# Altium PCB PCB_layout.PcbDoc
Units mil, origin at the board's own origin, x right, y up, seen from the top; angles counter-clockwise.
Board outline 2530 x 2800 mil, 2 copper layers (Top Layer, Bottom Layer); 33 components, 35 nets, 108 pads, 6 vias.
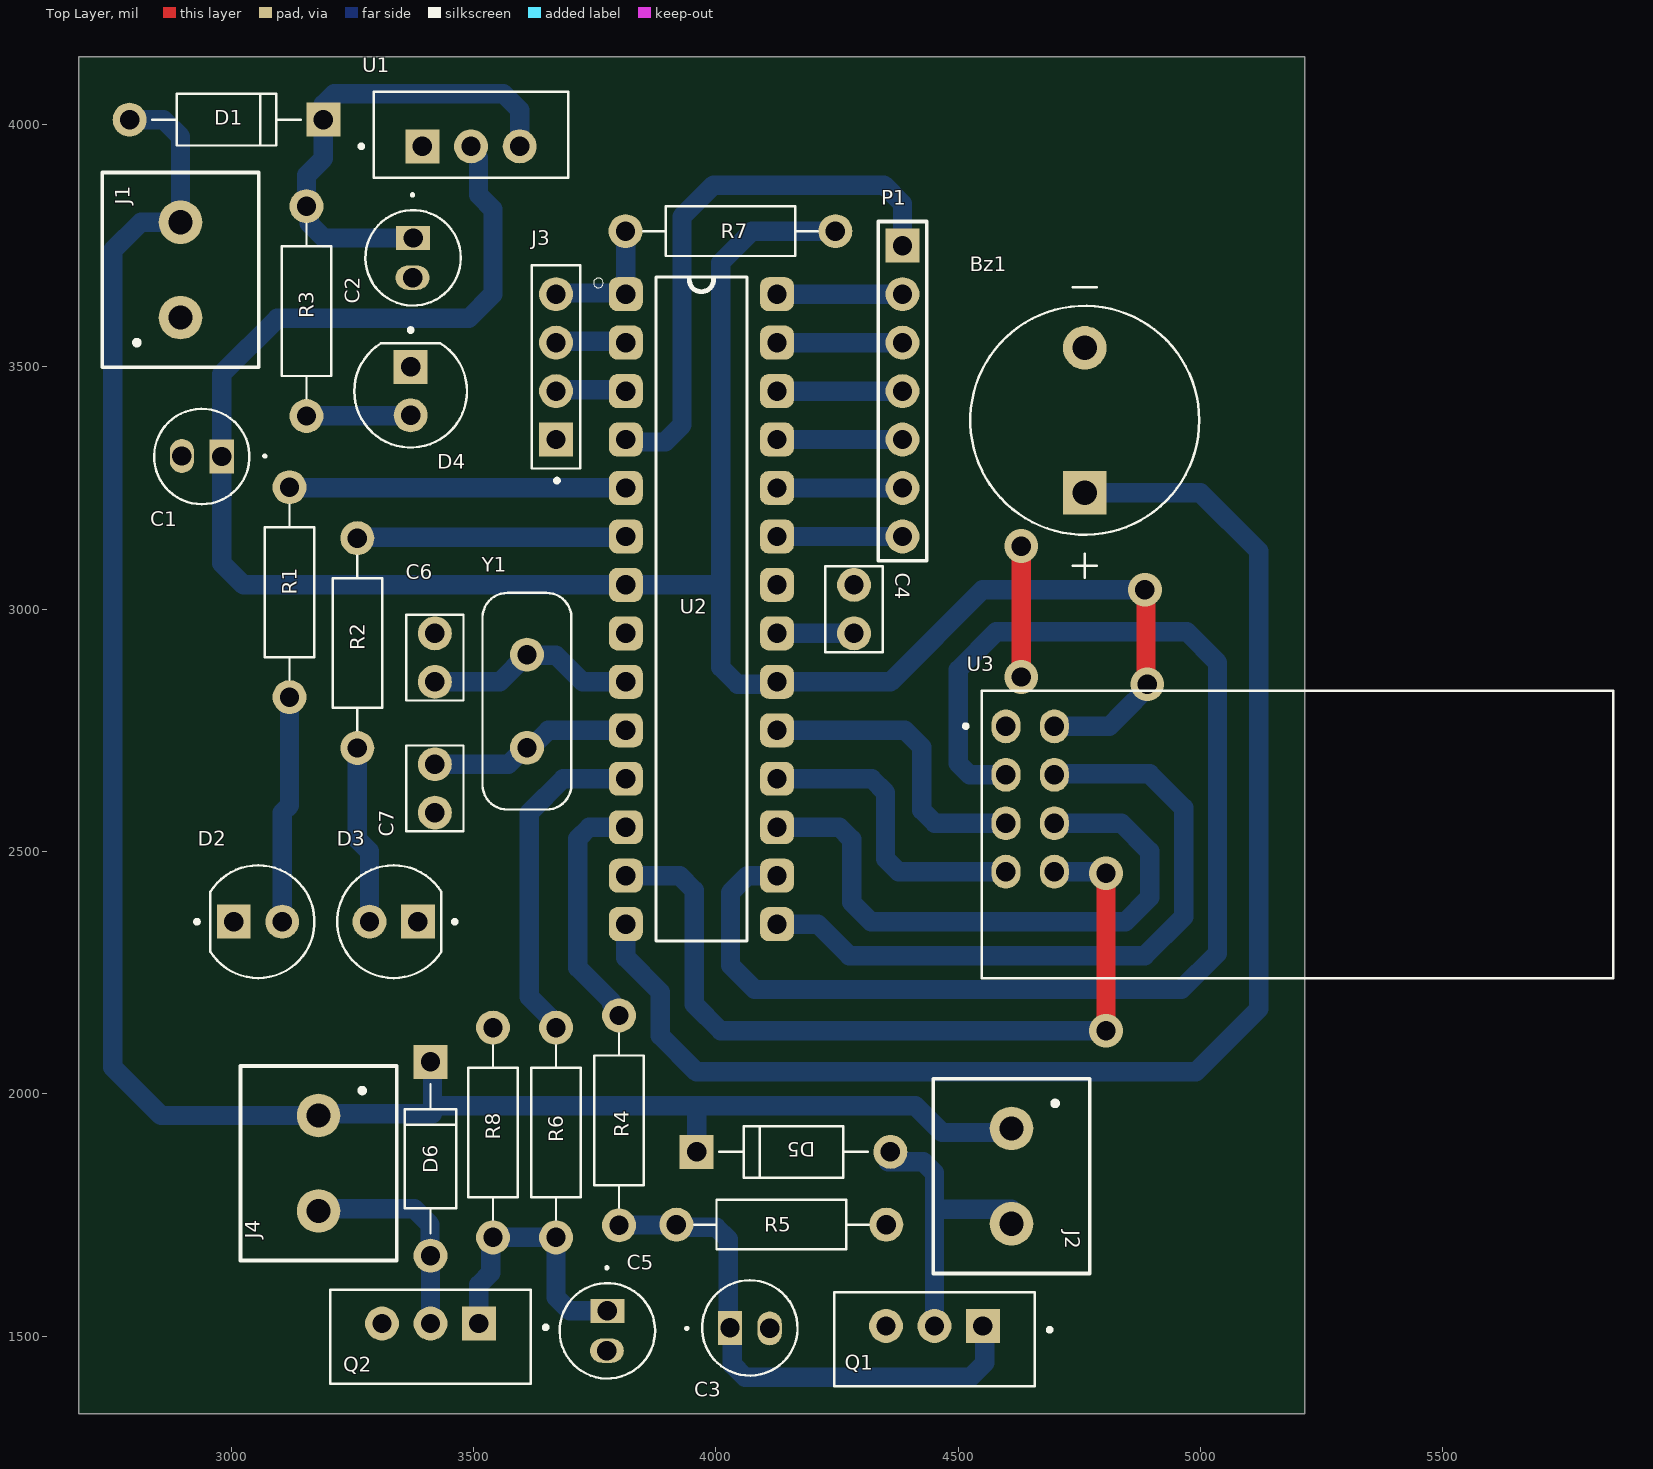
[diagram p0: Top Layer view]
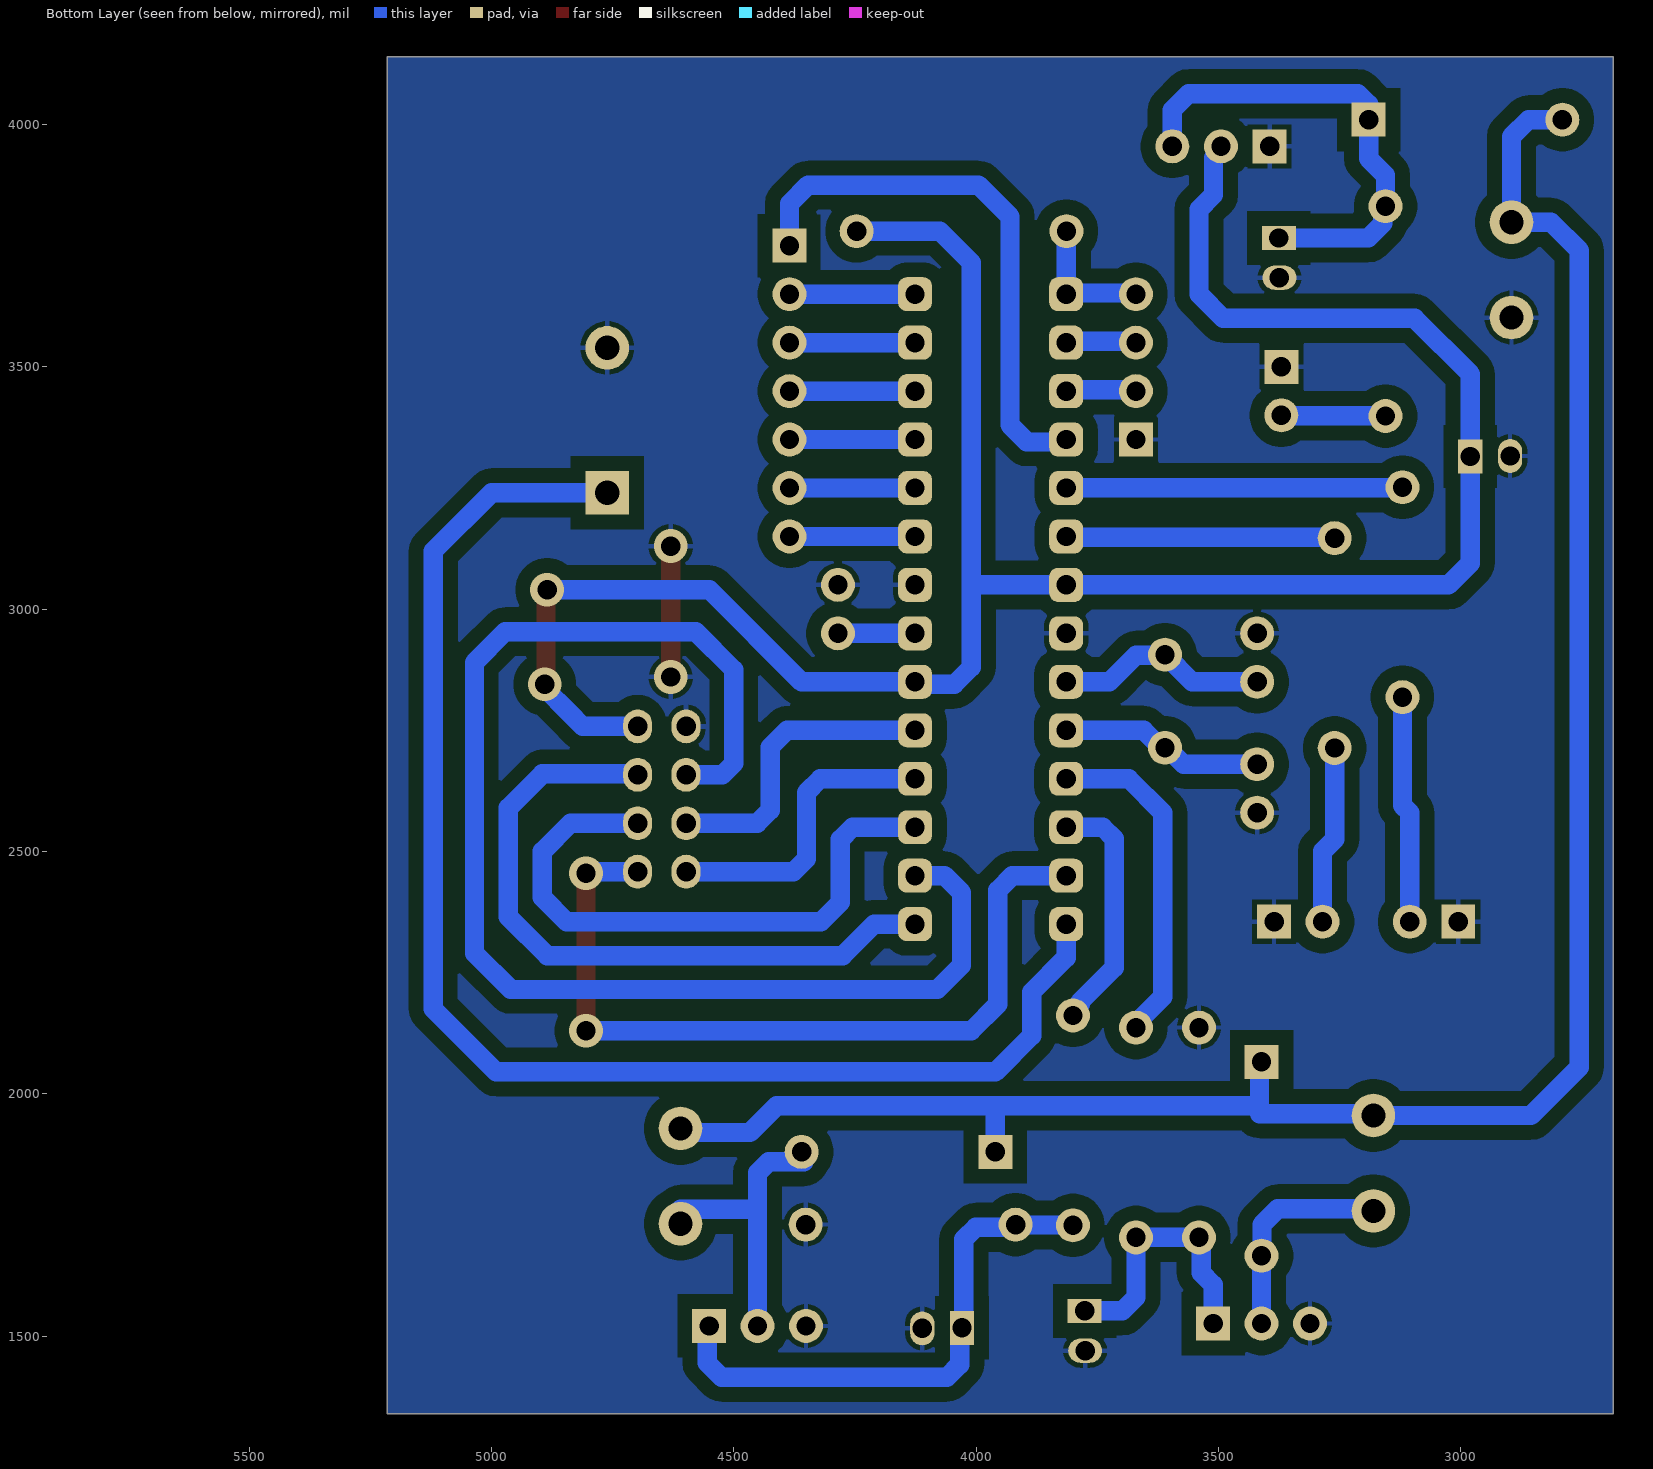
[diagram p1: Bottom Layer view, seen from below]
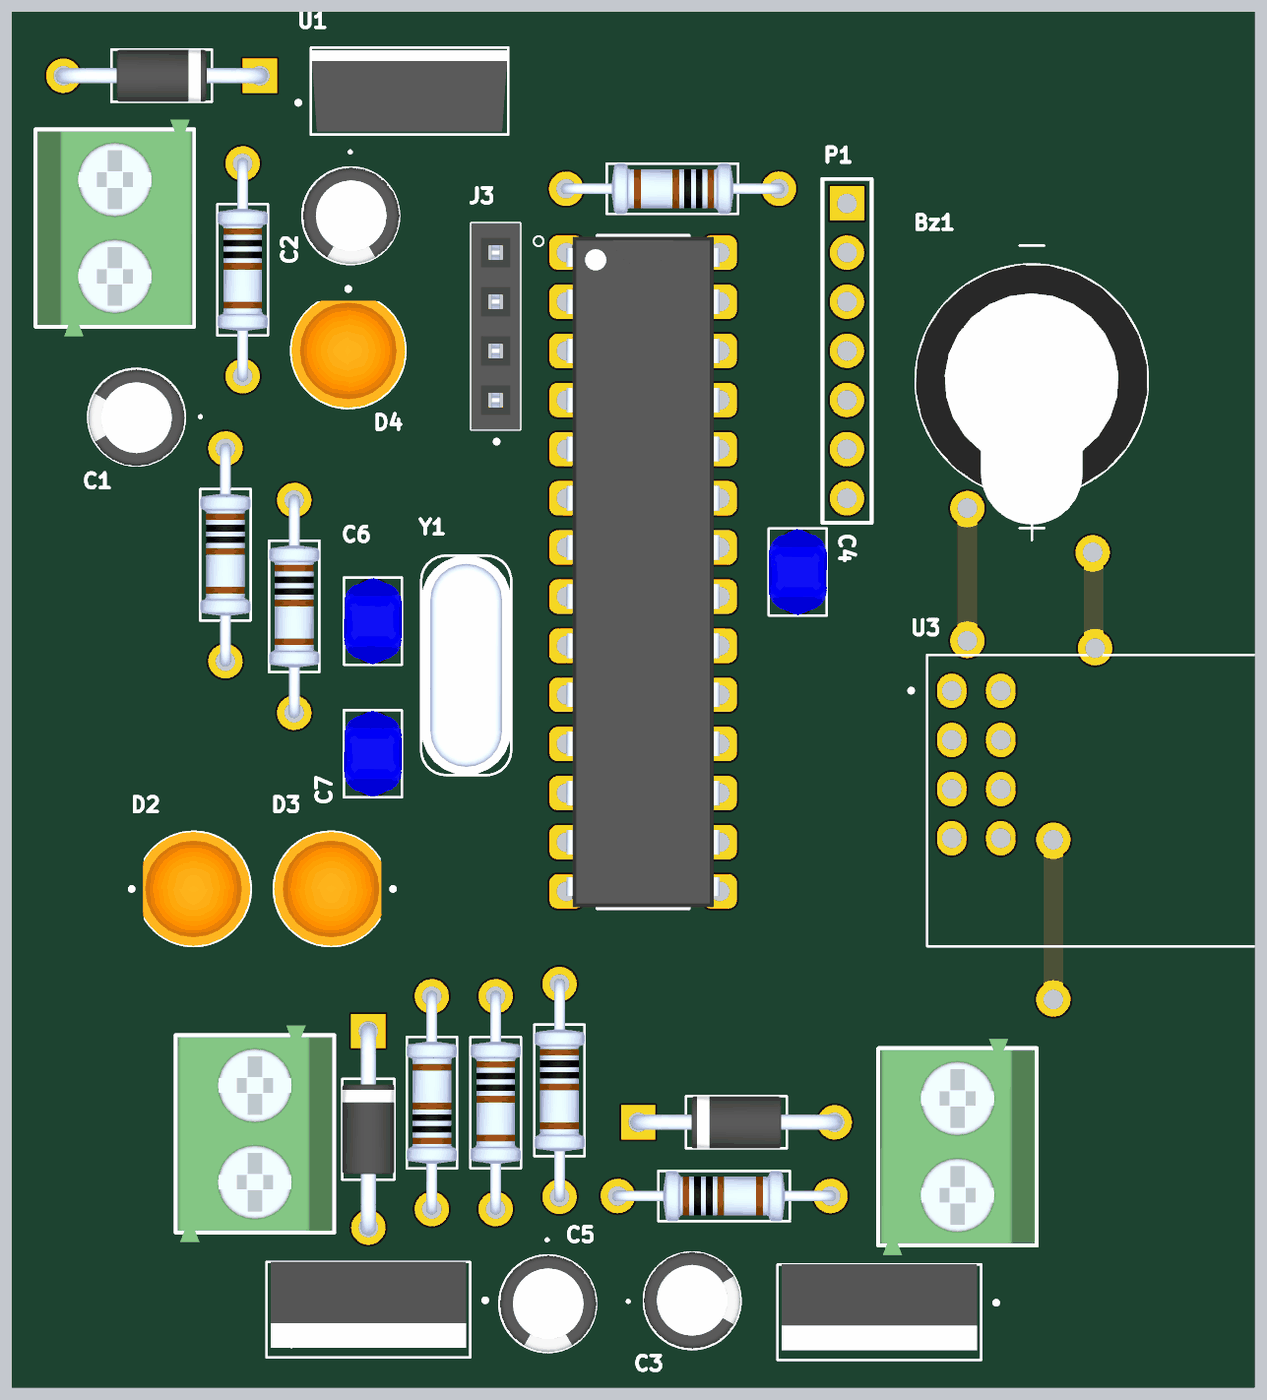
[diagram p2: 3D render of the assembled board from above, using the file's embedded part models]

## Layer stack, top to bottom
Top Solder: solder mask 0.4, Solder Resist, Dk 3.5
Top Layer: signal copper 1.4
Dielectric 1: dielectric 12.6, FR-4, Dk 4.8
Bottom Layer: signal copper 1.4
Bottom Solder: solder mask 0.4, Solder Resist, Dk 3.5

## Board outline
2685,1340 5215,1340 5215,4140 2685,4140

## Design rules (kind name [scope] priority, off if disabled: settings)
Clearance [All] p1: gap=30 ignorepadtopadclearanceinfootprint=FALSE
PolygonConnect [All] p1: connectstyle=Relief reliefconductorwidth=10 reliefentries=4 polygonreliefangle="90 Angle" airgapwidth=10
RoutingVias [All] p1: holewidth=40 width=70 viastyle="Through Hole" minholewidth=40 minwidth=70 maxholewidth=40 maxwidth=70
SolderMaskExpansion [All] p1: expansion=4 istentingtop=FALSE
Width [All] p1: maxlimit=50 minlimit=30 preferedwidth=40
30 further rules are at their usual default settings.

## Components (designator, comment, footprint, x,y, rotation, side; value= is the part's Value field where it differs from the comment)
Bz1 "AI-1223-TWT-12V-R" XDCR_AI-1223-TWT-12V-R 4761.09,3389.61 r180 top
C1 "10uF" CAPPRD500W50D500H1100 2939,3315 r180 top
C2 "100uF" CAPPRD500W50D500H1100 3375,3725 r270 top
C3 "100uF" CAPPRD500W50D500H1100 4069.91,1516.78 r0 top
C4 "100nF" CAPRB500W50L450T300H550 4285,2950 r90 top
C5 "100uF" CAPPRD500W50D500H1100 3775.91,1510.78 r270 top
C6 "22pF" CAPRB500W50L450T300H550 3420,2850 r90 top
C7 "22pF" CAPRB500W50L450T300H550 3420,2680 r270 top
D1 "1N4007" DIOAD1060W80L520D270 2990,4010 r180 top
D2 "L08R5000Q1" LEDRD254W57D500H1070 3055,2355 r0 top
D3 "L08R5000Q1" LEDRD254W57D500H1070 3335,2355 r180 top
D4 "L08R5000Q1" LEDRD254W57D500H1070 3370,3450 r270 top
D5 "1N4007" DIOAD1060W80L520D270 4160,1880 r0 top
D6 "1N4007" DIOAD1060W80L520D270 3410.91,1865.78 r270 top
J1 "TBlock 2" 691111710002 2895,3700 r90 top
J2 "TBlock 2" 691111710002 4610,1830 r270 top
J3 "Header 4" SULLINS_PPTC041LFBN-RC 3670,3500 r90 top
J4 "TBlock 2" 691111710002 3180,1856.57 r270 top
P1 "Header 7" HDR1X7 4385,3750 r270 top
Q1 "N-Channel mosfet" TO254P1052X465X1989-3 4550.91,1520.78 r180 top
Q2 "N-Channel mosfet" TO254P1052X465X1989-3 3510.91,1525.78 r180 top
R1 "100" RESAD1100W55L680D260 3120,3035 r90 top
R2 "100" RESAD1100W55L680D260 3260,2930 r90 top
R3 "1k" RESAD1100W55L680D260 3155,3615 r90 top
R4 "1k" RESAD1100W55L680D260 3800,1945 r90 top
R5 "1k" RESAD1100W55L680D260 4135,1730 r180 top
R6 "1k" RESAD1100W55L680D260 3670,1920 r90 top
R7 "10k" RESAD1100W55L680D260 4030,3780 r0 top
R8 "1k" RESAD1100W55L680D260 3540,1920 r270 top
U1 "LD1117V33" TO255P1020X450X1968-3 3494.61,3978.82 r0 top
U2 "ATMEGA328P-PU" DIP794W46P254L2967H457Q28B 3970,3000 r0 top
U3 "NRF24L01" XCVR_NRF24L01P-MODULE-PCB 5200,2535 r0 top
Y1 "16MHz" XTAL_ECS-160-20-4X 3610,2810 r270 top

## Footprints (in the part's own frame and the unit in brackets; to place one, negate y for a bottom-side part, rotate by r counter-clockwise, add the part's x,y. Pads: shape width x height; smd on the part's side, far side on the other; paste and mask are expansions set on the pad)
691111710002 [mil]
  round 90 hole 50: 1(-98.43,0) 2(98.43,0)
  silkscreen extent -201,-161 201,161, body extent -220,-157 220,157, height 434
CAPPRD500W50D500H1100 [mil]
  oval 50x70 hole 40: N(41,-1)
  rect 50x70 hole 40: P(-41,0)
  silkscreen extent -131,-98 98,98, body extent -108,-97 108,99, height 434
CAPRB500W50L450T300H550 [mil]
  round 70 hole 40: 1(0,0) 2(100,0)
  silkscreen extent -39,-59 139,59, body extent -38,-59 138,59, height 210
DIOAD1060W80L520D270 [mil]
  round 70 hole 40: A(200,0)
  rect 70x70 hole 40: C(-200,0)
  silkscreen extent -154,-53 154,53, body extent -216,-53 216,53, height 99
DIP794W46P254L2967H457Q28B [mil]
  rrect50% 70x70 hole 40: 1(-155.91,650) 2(-155.91,550) 3(-155.91,450) 4(-155.91,350) 5(-155.91,250) 6(-155.91,150) 7(-155.91,50) 8(-155.91,-50) 9(-155.91,-150) 10(-155.91,-250) 11(-155.91,-350) 12(-155.91,-450) 13(-155.91,-550) 14(-155.91,-650) 15(155.91,-650) 16(155.91,-550) 17(155.91,-450) 18(155.91,-350) 19(155.91,-250) 20(155.91,-150) 21(155.91,-50) 22(155.91,50) 23(155.91,150) 24(155.91,250) 25(155.91,350) 26(155.91,450) 27(155.91,550) 28(155.91,650)
  silkscreen extent -223,-685 94,685, body extent -156,-682 156,683, height 180
HDR1X7 [mil] "Connector; Header; 7 Position"
  rect 70x70 hole 40: 1(0,0)
  round 70 hole 40: 2(100,0) 3(200,0) 4(300,0) 5(400,0) 6(500,0) 7(600,0)
  silkscreen extent -50,-50 650,50
LEDRD254W57D500H1070 [mil]
  round 70 hole 40: A(50,0)
  rect 70x70 hole 40: C(-50,0)
  silkscreen extent -130,-116 116,116, body extent -102,-116 116,116, height 358
RESAD1100W55L680D260 [mil]
  round 70 hole 40: 1(-216.54,0) 2(216.54,0)
  silkscreen extent -180,-51 180,51, body extent -227,-51 227,51, height 101
SULLINS_PPTC041LFBN-RC [mil]
  rect 70x70 hole 40: 1(-150,0)
  round 70 hole 40: 2(-50,0) 3(50,0) 4(150,0)
  silkscreen extent -239,-50 210,50, body extent -210,-50 210,50, height 335
TO254P1052X465X1989-3 [mil]
  rect 70x70 hole 40: 1(0,0)
  round 70 hole 40: 2(100,0) 3(200,0)
  silkscreen extent -142,-70 307,124, body extent -99,-71 299,105, height 781
TO255P1020X450X1968-3 [mil]
  rect 70x70 hole 40: 1(-100.39,-23.82)
  round 70 hole 40: 2(0,-23.82) 3(100.39,-23.82)
  silkscreen extent -230,-89 201,89, body extent -200,-82 200,83, height 901
XCVR_NRF24L01P-MODULE-PCB [mil]
  oval 60x70 hole 40: 1(-601.75,223.18) 2(-501.75,223.18) 3(-601.75,123.18) 4(-501.75,123.18) 5(-601.75,23.18) 6(-501.75,23.18) 7(-601.75,-76.82) 8(-501.75,-76.82)
  silkscreen extent -688,-296 652,296
XDCR_AI-1223-TWT-12V-R [mil]
  round 90 hole 50: N(0,-149.61)
  rect 90x90 hole 50: P(0,149.61)
  silkscreen extent -236,-275 236,325, body extent -236,-236 236,293, height 376
XTAL_ECS-160-20-4X [mil]
  round 70 hole 40: 1(-96.06,0) 2(96.06,0)
  silkscreen extent -223,-92 223,92, body extent -223,-92 223,92, height 138

## Part data
Bz1: library part Buzzer, "ELECTRO-MECHANICAL AUDIO INDICATOR", Package="2225 PUI Audio", Availability="In Stock", MF="PUI Audio,", MP=AI-1223-TWT-12V-R, Price=None, Purchase-URL=https://pricing.snapeda.com/search/part/AI-1223-TWT-12V-R/?ref=eda
C1 C2 C3 C5: library part "Electrolytic capacitor", "FS-A", Package=None, Availability=Unavailable, MF="{'manufacturer': u'Panasonic'}", MP=EEUFS0J221B, Price=None
C4 C6 C7: library part "Ceramic capacitor", "2200 pF Â±10% 250V Ceramic Capacitor X7R Radial", Package="Radial TDK", Check_prices=https://www.snapeda.com/parts/FG24X7R2E222KNT06/TDK/view-part/?ref=eda, Digi-Key_Part_Number=445-173386-1-ND, MF=TDK, MP=FG24X7R2E222KNT06, Purchase-URL=https://pricing.snapeda.com/search/part/FG24X7R2E222KNT06/?ref=eda, SnapEDA_Link=https://www.snapeda.com/parts/FG24X7R2E222KNT06/TDK/view-part/?ref=snap
D1 D5 D6: "Diode Switching 1KV 1A 2-Pin DO-41", Package=None, Availability=Unavailable, MP=1N4007, Price=None
D2 D3 D4: library part LED, "LED, Orange, Through Hole, T-1 3/4 (5mm), 30 mA, 2.1 V, 635 nm", Package=None, Availability=Unavailable, MF="{'manufacturer': u'LED Technology'}", MP=L08R5000Q1, Price=None
J1 J2 J4: library part "Terminal Block - 2Pins", "2 Position Wire to Board Terminal Block Horizontal with Board 0.197 _5.00mm_ Through Hole", Package=None, Availability=Unavailable, MF="Wurth Electronics", MP=691111710002, Price=None, SnapEDA_Link=https://www.snapeda.com/parts/691111710002/Wurth%20Electronics%20Inc./view-part/1195092/?ref=snap
J3: library part "Female header - 4Pins", "4 Position Header Connector Through Hole", Package=None, Availability=Warning, Check_prices=https://www.snapeda.com/parts/PPTC041LFBN-RC/Sullins%20Connector%20Solutions/view-part/285917/?ref=eda, MF="Sullins Connector", MP=PPTC041LFBN-RC, Price=None, Purchase-URL=https://pricing.snapeda.com/search/part/PPTC041LFBN-RC/?ref=eda, SnapEDA_Link=https://www.snapeda.com/parts/PPTC041LFBN-RC/Sullins%20Connector%20Solutions/view-part/285917/?ref=snap
P1: "Header, 7-Pin", LatestRevisionDate=17-Jul-2002, LatestRevisionNote="Re-released for DXP Platform.", Publisher="Altium Limited"
Q1 Q2: library part IRF540, "N-Channel 100V 22A (Tc) 85W (Tc) Through Hole TO-220AB", Package=None, Availability=Unavailable, MP=IRF540, Price=None
R1 R2 R3 R4 R5 R6 R7 R8: library part "Resistor (0.25W)", "(MFR-25FBF52-10K) 10,2 kOhm bei 1% 0,25W, 1/4W Durchbohrlochwiderstand Axial Metal Film", Package="Axial Yageo", Digi-Key_Part_Number=10.2KXBK-ND, MF=Yageo, MP=MFR-25FBF52-10K, Purchase-URL=https://pricing.snapeda.com/search/part/MFR-25FBF52-10K/?ref=eda, SnapEDA_Link=https://www.snapeda.com/parts/MFR-25FBF52-10K/Yageo/view-part/424333/?ref=snap
U1: Package=None, Availability=Unavailable, MP=LD1117V33, Price=None
U2: "ATmega Series 20 MHz 32 KB Flash 2 KB SRAM 8-Bit Microcontroller - DIP-28", Package=None, Availability=Unavailable, MP=ATMEGA328P-PU, Price=None
U3: library part NRF24L01P-MODULE-PCB, "- Transceiver For Use With nRF24L01+", Package=None, Availability=Bad, MF="Nordic Semiconductor", Mouser-Purchase-URL=https://snapeda.com/shop?store=Mouser&id=230534, MP=NRF24L01P-MODULE-PCB, Price=None, SnapEDA_Link=https://www.snapeda.com/parts/NRF24L01P-MODULE-PCB/Nordic%20Semiconductor%20ASA/view-part/230534/?ref=snap
Y1: library part "Crystal oscilator", "CRYSTAL T/H", Package=None, Availability=Unavailable, MF="{'manufacturer': u'ECS Inc.'}", MP=ECS-160-S-4, Price=None

## Via types
v1: diameter 70, hole 40, Top Layer to Bottom Layer, 6 vias

## Nets (pads, with @x,y where several pads share a name; then routed paths per layer and width w, separated by ;. In a path a pad name is that pad's centre, name@x,y a point inside that pad or via, vN(x,y) a via of type N, cw(c..) or ccw(c..) an arc to the next point about the centre after c; other vN are vias at no path point)
+3V3: C1.P R7.2 U1.2 U2.7 U2.20 U3.2 | length 4889.2
  Top Layer w40: v1(4885,3040) 4887.5,3037.5 4887.5,2847.5 v1(4890,2845)
  Bottom Layer w40: U1.2 3494.61,3946.88 3510,3931.49 3510,3855 3540,3825 3540,3650 3490,3600 3095,3600 2980,3485 C1.P 2980,3095 3025,3050 U2.7 4010,3050 ; R7.2 4075,3780 4010,3715 4010,3050 ; U3.2 4811.57,2758.18 4839.85,2786.47 4839.85,2786.73 4890,2836.88 v1(4890,2845) ; v1(4885,3040) 4550,3040 4360,2850 U2.20 4120.91,2845 4045,2845 4010,2880 4010,3050
+12: D1.A D5.C D6.C J1.2 J2.1 J4.1 | length 4273.4
  Bottom Layer w40: D1.A 2860,4010 2895,3975 J1.2 2813.43,3798.43 2755,3740 2755,2055 2855,1955 J4.1 3183.5,1958.5 3415,1958.5 3415,2061.69 D6.C ; 3415,1975 3960,1975 ; D5.C 3960,1975 ; J2.1 4601.57,1920 4466.47,1920 4411.47,1975 3960,1975
buzzer: Bz1.P U2.14 | length 2932.9
  Bottom Layer w40: U2.14 3814.09,2280.91 3885,2210 3885,2120 3960,2045 4990,2045 5120,2175 5120,3120 5000,3240 Bz1.P
CE: U2.16 U3.3 | length 2812.4
  Bottom Layer w40: U2.16 4065,2450 4030,2415 4030,2265 4080,2215 4960,2215 5035,2290 5035,2890 4971.42,2953.58 4578.58,2953.58 4500,2875 4500,2681.62 4523.43,2658.18 U3.3
column1: P1.3 U2.27 | length 259.1
  Bottom Layer w40: U2.27 P1.3
column2: P1.2 U2.28 | length 259.1
  Bottom Layer w40: U2.28 P1.2
column3: P1.1 U2.4 | length 1146.9
  Bottom Layer w40: U2.4 3819.09,3345 3895,3345 3930,3380 3930,3810 3995,3875 4346.57,3875 4385,3836.57 P1.1
CSN: U2.15 U3.4 | length 1420.7
  Bottom Layer w40: U2.15 4210,2350 4275,2285 4885,2285 4965,2365 4965,2590 4895,2660 4700.06,2660 U3.4
GND: Bz1.N C1.N C2.N C3.N C4.2 C5.N C6.2 C7.2 D2.C D3.C D4.C J1.1 J3.1 Q1.3 Q2.3 R5.1 R8.1 U1.1 U2.8 U2.22 U3.1 | length 270
  Top Layer w40: v1(4630,2860) v1(4630,3130)
indicator1: R1.2 U2.5 | length 694.7
  Bottom Layer w40: R1.2 3120.77,3250.77 3813.33,3250.77 U2.5
indicator2: R2.2 U2.6 | length 555.5
  Bottom Layer w40: R2.2 3261.73,3148.27 3812.36,3148.27 U2.6
IRQ: U2.13 U3.8 | length 1694.2
  Top Layer w40: v1(4805,2130) v1(4805,2455)
  Bottom Layer w40: U2.13 3925,2450 3955,2420 3955,2185 4010,2130 v1(4805,2130) ; U3.8 4801.81,2458.18 v1(4805,2455)
lock1: R4.2 U2.12 | length 509
  Bottom Layer w40: R4.2 3800,2169.65 3785,2184.65 3785,2190 3715,2260 3715,2526.57 3738.43,2550 U2.12
lock2: R6.2 U2.11 | length 694.3
  Bottom Layer w40: R6.2 3670,2144.65 3615,2199.65 3615,2580 3685,2650 U2.11
MISO: U2.18 U3.7 | length 631.8
  Bottom Layer w40: U2.18 4321.57,2650 4350,2621.57 4350,2485 4376.81,2458.18 U3.7
MOSI: U2.17 U3.6 | length 1262.6
  Bottom Layer w40: U2.17 4255,2550 4280,2525 4280,2395 4320,2355 4845,2355 4895,2405 4895,2500 4836.81,2558.18 U3.6
NetC2_P: C2.P D1.C R3.2 U1.3 | length 992.5
  Bottom Layer w40: C2.P 3190.68,3766 3160.74,3795.94 3160.74,3825.8 R3.2 3155,3895 3190,3930 D1.C 3190,4041.57 3212.32,4063.89 3561.11,4063.89 3595,4030 U1.3
NetC3_P: C3.P Q1.1 R4.1 R5.2 | length 1122.5
  Bottom Layer w40: R4.1 3800.77,1729.23 3917.7,1729.23 R5.2 3924.2,1724.26 4000.74,1724.26 4025,1700 4025,1520.69 C3.P 4033.91,1511.78 4033.91,1441.09 4060,1415 4525,1415 4555,1445 4555,1516.69 Q1.1
NetC4_1: C4.1 U2.21 | length 159.1
  Bottom Layer w40: U2.21 C4.1
NetC5_P: C5.P Q2.1 R6.1 R8.2 | length 560.8
  Bottom Layer w40: Q2.1 3510.91,1605.91 3535,1630 3535,1698.46 R8.2 R6.1 3670,1580 3698.22,1551.78 C5.P
NetD2_A: D2.A R1.1 | length 469.7
  Bottom Layer w40: D2.A 3105,2580 3120,2595 R1.1
NetD3_A: D3.A R2.1 | length 368.8
  Bottom Layer w40: R2.1 3260,2525 3285,2500 D3.A
NetD4_A: D4.A R3.1 | length 215.6
  Bottom Layer w40: R3.1 3155.77,3399.23 3369.23,3399.23 D4.A
NetD5_A: D5.A J2.2 Q1.2 | length 584
  Bottom Layer w40: D5.A@4355,1860 4427.47,1860 4450.91,1836.57 4450.91,1770 ; Q1.2 4450.91,1770 ; J2.2@4610,1761.57 4459.33,1761.57 4450.91,1770
NetD6_A: D6.A J4.2 Q2.2 | length 467.1
  Bottom Layer w40: J4.2@3160.91,1762.36 3377.64,1762.36 3410,1730 3410,1666.69 D6.A Q2.2
NetJ3_2: J3.2 U2.3 | length 145.1
  Bottom Layer w40: J3.2@3670,3452.5 3811.59,3452.5 U2.3
NetJ3_3: J3.3 U2.2 | length 145.1
  Bottom Layer w40: J3.3@3670,3552.5 3811.59,3552.5 U2.2
reset: J3.4 R7.1 U2.1 | length 274.9
  Bottom Layer w40: J3.4@3670,3652.5 3811.59,3652.5 U2.1@3813.78,3650.31 ; R7.1 3813.78,3779.68 U2.1@3813.78,3650.31 ; U2.1 U2.1@3813.78,3650.31
row1: P1.7 U2.23 | length 259.1
  Bottom Layer w40: U2.23 P1.7
row2: P1.6 U2.24 | length 259.1
  Bottom Layer w40: U2.24 P1.6
row3: P1.5 U2.25 | length 259.1
  Bottom Layer w40: U2.25 P1.5
row4: P1.4 U2.26 | length 259.1
  Bottom Layer w40: U2.26 P1.4
SCK: U2.19 U3.5 | length 628
  Bottom Layer w40: U2.19 4390,2750 4425,2715 4425,2585 4451.82,2558.18 U3.5
xtal1: C6.1 U2.9 Y1.1 | length 438.3
  Bottom Layer w40: C6.1@3422.24,2850 3553.94,2850 Y1.1 3611.06,2905 3670,2905 3725,2850 U2.9
xtal2: C7.1 U2.10 Y1.2 | length 422.2
  Bottom Layer w40: C7.1@3420.86,2680 3571.57,2680 3605.51,2713.94 3618.12,2713.94 3654.18,2750 U2.10

## Polygon pours and split planes (outlines as drawn)
GND on Bottom Layer "GND_L02_P000" (solid, pour order 0): 2685,4140 2685,1340 5214.95,1340 5215.03,1340.08 5215,1340.11 5215,4140 2685.02,4140 2684.87,4140.15